# Altium PCB kretskort.PcbDoc
Units mm, origin at the board's own origin, x right, y up, seen from the top; angles counter-clockwise.
Board outline 58.95 x 35.81 mm, 4 copper layers (L1 - SIG, L2 - PWR, L3 - GND, L4 - SIG), stack 0.603 mm thick; 21 components, 41 nets, 122 pads, 56 vias.
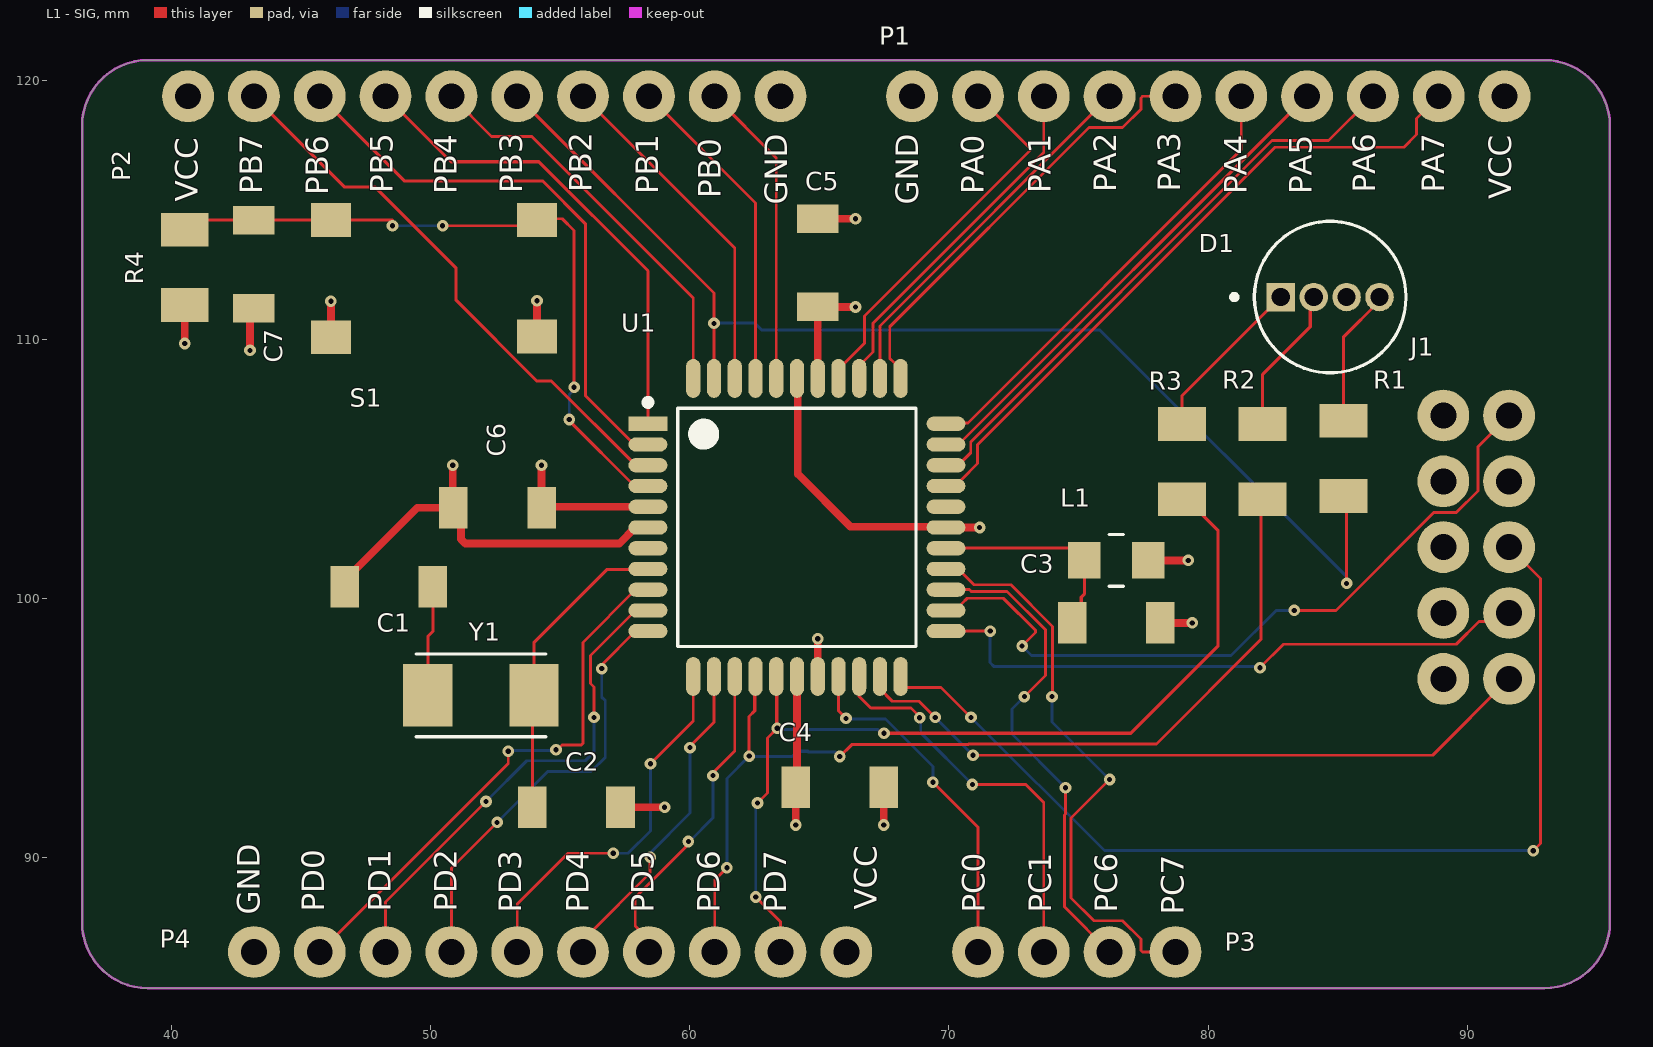
[diagram p0: L1 - SIG view]
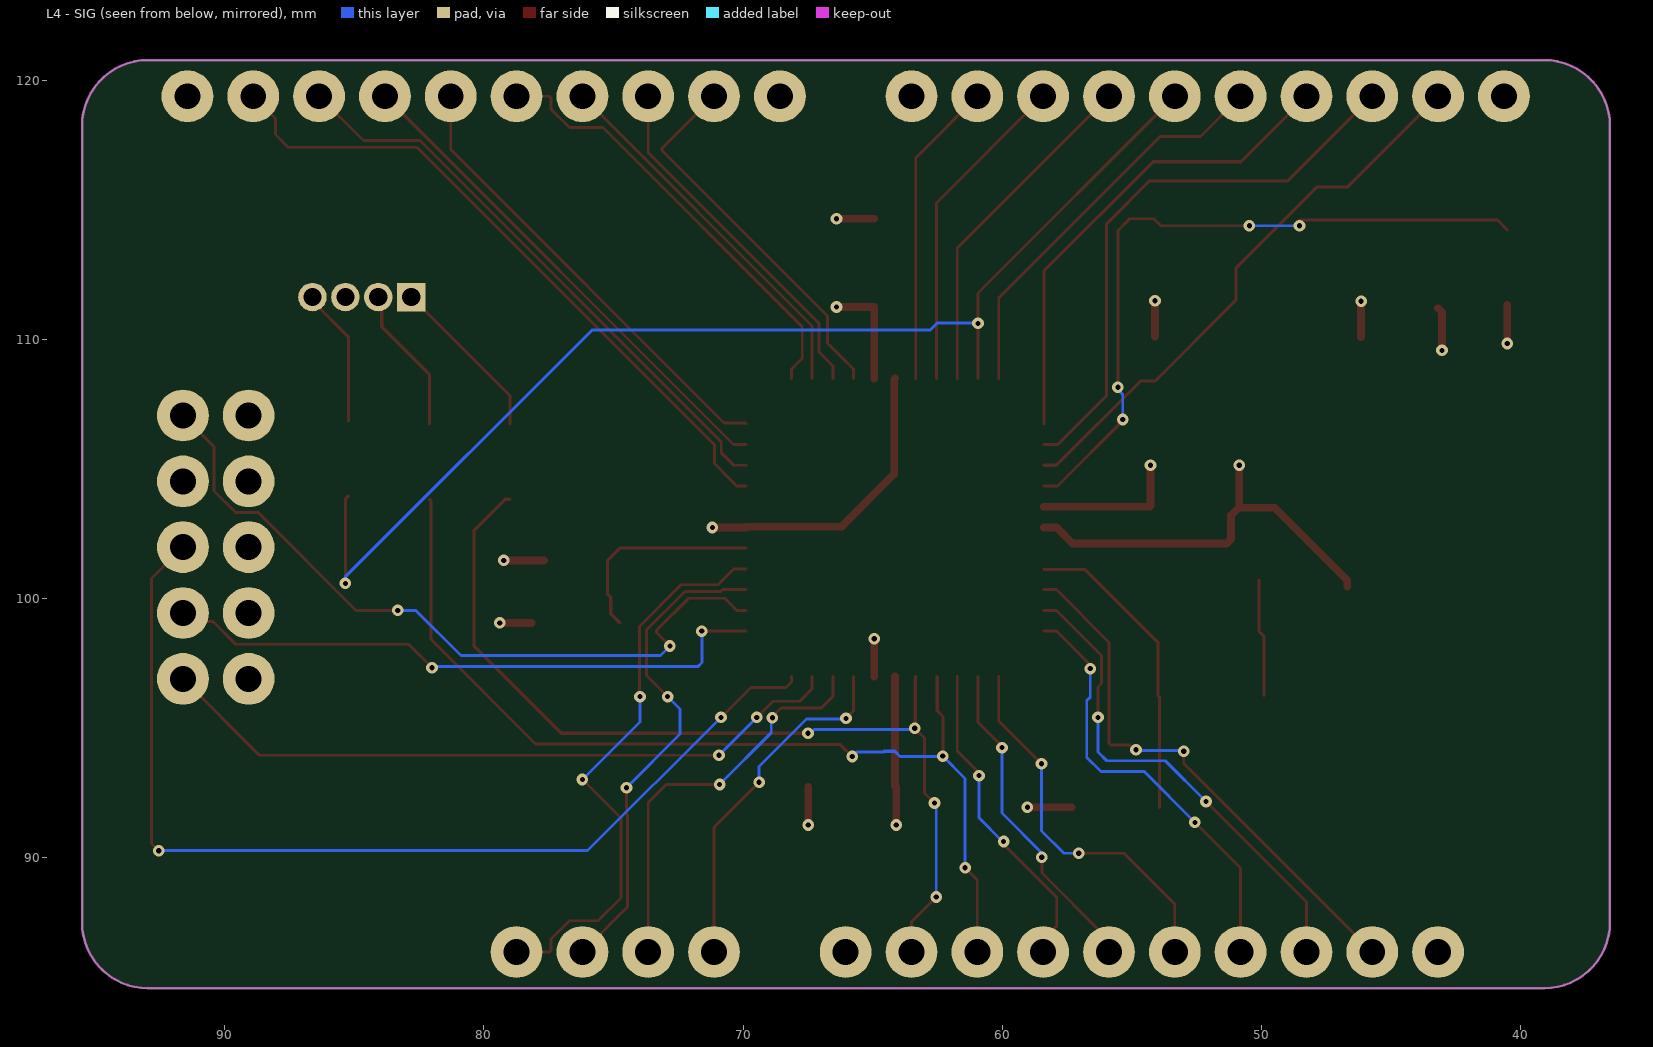
[diagram p1: L4 - SIG view, seen from below]
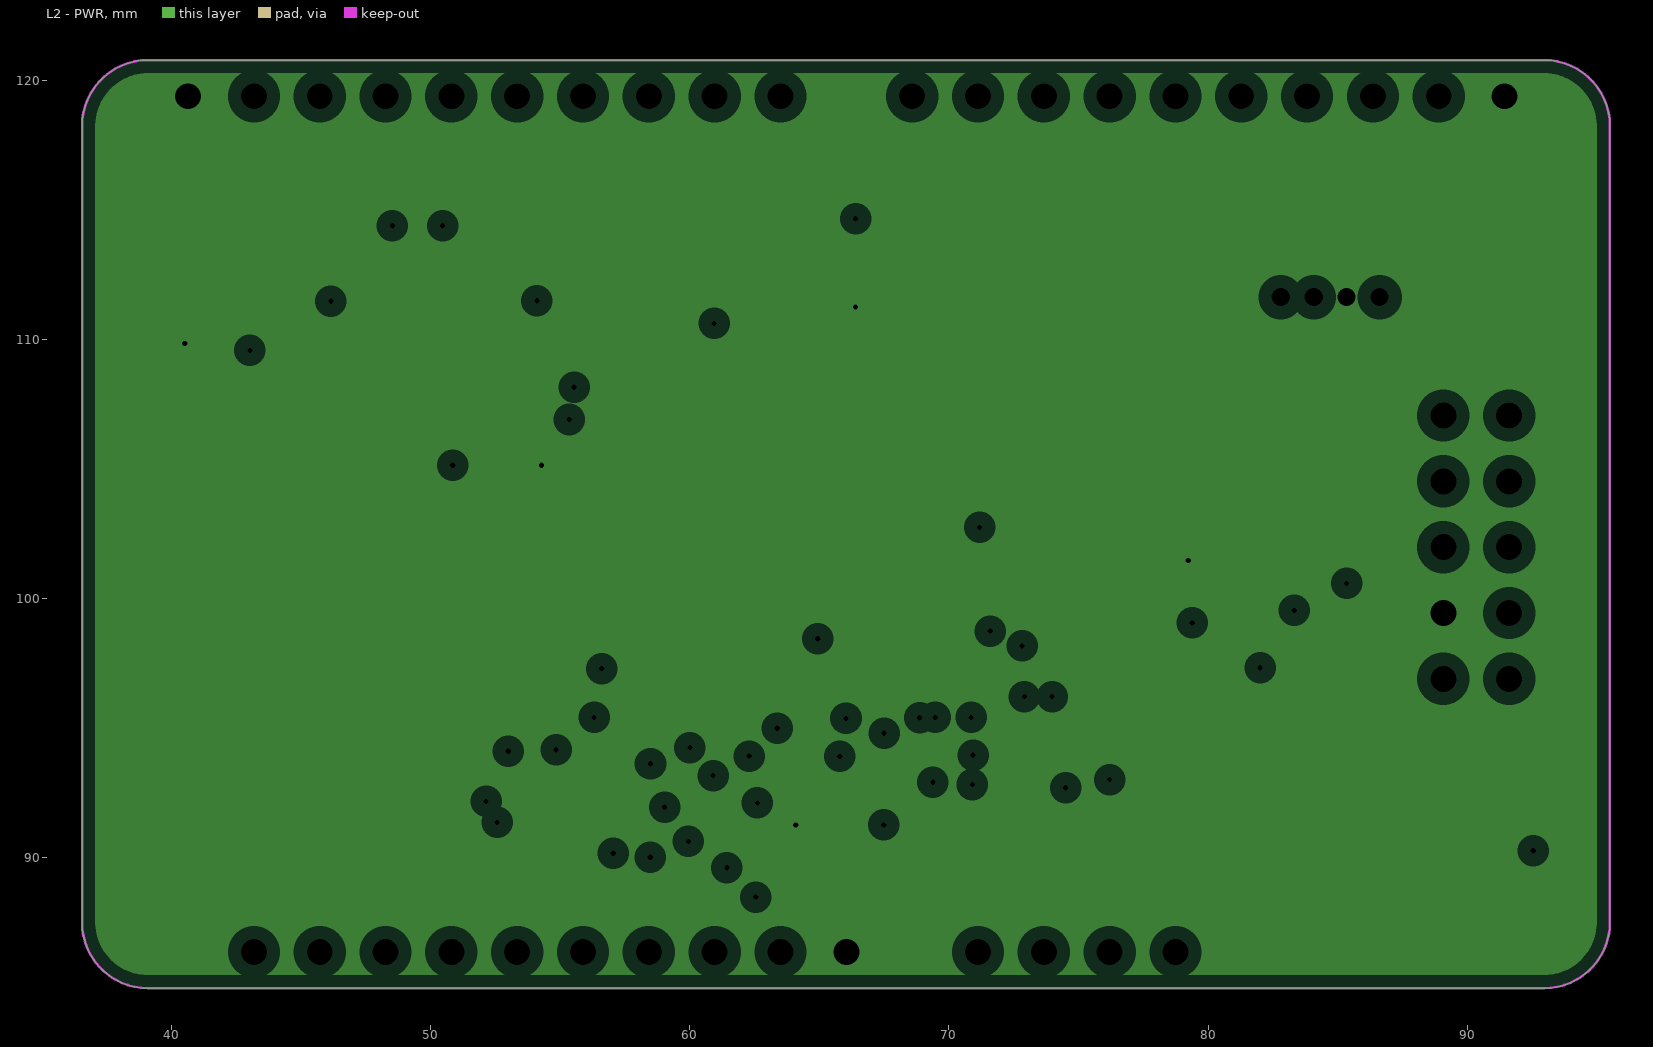
[diagram p2: L2 - PWR, clearances drawn from the general rule]
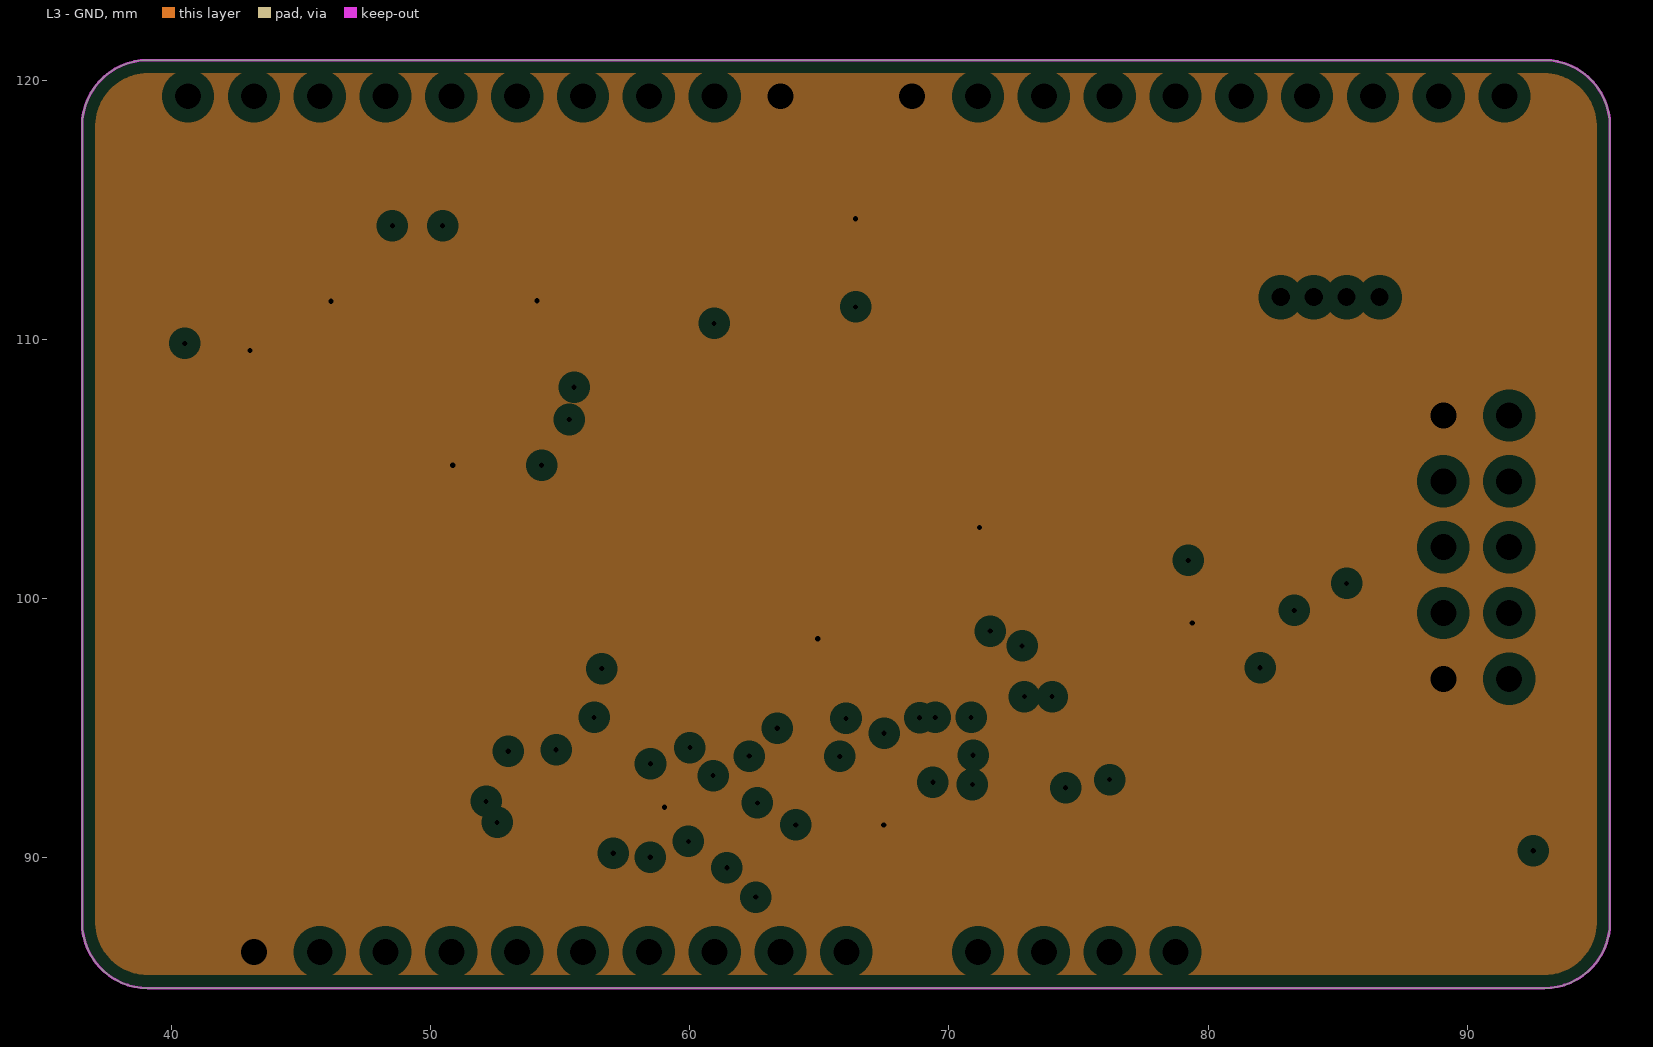
[diagram p3: L3 - GND, clearances drawn from the general rule]

## Layer stack, top to bottom
Top Solder: solder mask 0.0102, Solder Resist, Dk 3.5
L1 - SIG: signal copper 0.0356
Dielectric 2: prepreg 0.0711, PP-006, Dk 4.1
L2 - PWR: plane copper 0.035, net VCC
Dielectric 1: dielectric 0.32, FR-4, Dk 4.8
L3 - GND: plane copper 0.035, net GND
Dielectric 3: prepreg 0.0711, PP-006, Dk 4.1
L4 - SIG: signal copper 0.0356
Bottom Solder: solder mask 0.0102, Solder Resist, Dk 3.5

## Board outline
39.091,84.963 cw(c39.091,87.503) 36.551,87.503 36.551,118.237 cw(c39.091,118.237) 39.091,120.777 92.964,120.777 cw(c92.964,118.237) 95.504,118.237 95.504,87.503 cw(c92.964,87.503) 92.964,84.963

## Design rules (kind name [scope] priority, off if disabled: settings)
Clearance [All] p1: gap=0.15 ignorepadtopadclearanceinfootprint=FALSE except(0: Arc-Hole Track-Hole SMDPad-Hole THPad-Hole Via-Hole Fill-Hole Poly-Hole Region-Hole Text-Hole)
MinimumSolderMaskSliver [All] p1: minsoldermaskwidth=0.1
PlaneClearance [All] p1: clearance=0.508
PlaneConnect [All] p1: planeconnectstyle=Direct reliefexpansion=0.508 reliefentries=4 reliefconductorwidth=0.254 reliefairgap=0.254
PolygonConnect [All] p1: connectstyle=Relief reliefconductorwidth=0.254 reliefentries=4 polygonreliefangle="90 Angle" airgapwidth=0.254
RoutingVias [All] p1: holewidth=0.2 width=0.45 viastyle="Through Hole" minholewidth=0.2 minwidth=0.45 maxholewidth=0.4 maxwidth=0.8
SilkToSilkClearance [All] p1: silktosilkclearance=0.1
SilkToSolderMaskClearance [IsPad] p1: minsilkscreentomaskgap=0.1 clearancetoexposedcopper=TRUE
SolderMaskExpansion [All] p1: expansion=0.102 istentingtop=FALSE
Width Width_1 [InNet('VCC') or InNet('GND')] p1: maxlimit=0.3 minlimit=0.3 preferedwidth=0.3
Width [All] p2: maxlimit=0.8 minlimit=0.11 preferedwidth=0.12
25 further rules are at their usual default settings.

## Components (designator, comment, footprint, x,y, rotation, side; value= is the part's Value field where it differs from the comment)
C1 "CAP, 1206" 1206_180 48.387,100.457 r0 top value=10p
C2 "CAP, 1206" 1206_180 55.626,91.948 r0 top value=10p
C3 "CAP, 1206" 1206_180 76.454,99.06 r0 top value=100n
C4 "CAP, 1206" 1206_180 65.786,92.723 r0 top value=100n
C5 "CAP, 1206" 1206_180 64.935,112.952 r90 top value=100n
C6 "CAP, 1206" 1206_180 52.578,103.505 r180 top value=100n
C7 "CAP, 1206" 1206_180 43.18,112.903 r270 top value=100n
D1 "RGB LED" LED_QBL8RGB60D0-2897 84.709,111.633 r0 top
J1 "JTAG Connector" Atmel_JTAG 91.605,96.876 r90 top
L1 "Inductor, NLFV25T" INDM2520X190N 76.454,101.473 r180 top value=10u
P1 "1x10 Pin Header" 1x10_PIN_HEADER_2.54MM 91.44,119.38 r270 top locked value="1x2 Pin Header"
P2 "1x10 Pin Header" 1x10_PIN_HEADER_2.54MM 40.64,119.38 r90 top locked value="1x2 Pin Header"
P3 "1x4 Pin Header" 1x4_PIN_HEADER_2.54MM 78.74,86.36 r270 top locked value="1x2 Pin Header"
P4 "1x10 Pin Header" 1x10_PIN_HEADER_2.54MM 66.04,86.36 r270 top locked value="1x2 Pin Header"
R1 "RES, 1206" 1206 85.217,105.41 r90 top value=0
R2 "RES, 1206" 1206 82.105,105.283 r90 top value=0
R3 "RES, 1206" 1206 78.994,105.283 r90 top value=0
R4 "RES, 1206" 1206 40.513,112.776 r270 top value=0
S1 "Tactile Button" "tacButton smd" 54.102,110.109 r180 top value="Button SMD"
U1 "ATmega1284" TQFP-44 64.135,102.743 r0 top value=ATmega644PA
Y1 "XTAL-ABM3" XTAL_ABM3 51.943,96.266 r180 top

## Footprints (in the part's own frame and the unit in brackets; to place one, negate y for a bottom-side part, rotate by r counter-clockwise, add the part's x,y. Pads: shape width x height; smd on the part's side, far side on the other; paste and mask are expansions set on the pad)
1x4_PIN_HEADER_2.54MM [mm]
  round 2 hole 1: 1(0,0) 2(0,-2.54) 3(0,-5.08) 4(0,-7.62)
  body extent -1.24,-8.89 1.24,1.27, height 8.54
1x10_PIN_HEADER_2.54MM [mm]
  round 2 hole 1: 1(0,0) 2(0,-2.54) 3(0,-5.08) 4(0,-7.62) 5(0,-10.16) 6(0,-12.7) 7(0,-15.24) 8(0,-17.78) 9(0,-20.32) 10(0,-22.86)
  body extent -1.24,-24.13 1.24,1.27, height 8.54
1206 [mm]
  rect 1.3x1.85 smd: 1(-1.45,0) 2(1.45,0)
  body extent -1.7,-0.9 1.7,0.9, height 1.35
1206_180 [mm]
  rect 1.1x1.6 smd: 1(-1.7,0) 2(1.7,0)
  body extent -1.75,-0.95 1.75,0.95, height 1.8
Atmel_JTAG [mm]
  round 2 hole 1: 1(0.028,-0.01) 2(0.028,2.53) 3(2.568,-0.01) 4(2.568,2.53) 5(5.108,-0.01) 6(5.108,2.53) 7(7.648,-0.01) 8(7.648,2.53) 9(10.188,-0.01) 10(10.188,2.53)
  body extent -1.15,-1.36 11.55,3.64, height 8.6
INDM2520X190N [mm]
  rect 1.26x1.41 smd: 1(-1.23,0) 2(1.23,0)
  silkscreen extent -0.28,-1 0.28,1, body extent -1.25,-1 1.25,1, height 1.9
LED_QBL8RGB60D0-2897 [mm]
  rect 1.1x1.1 / inner round 1.1 / far side rect 1.1x1.1 hole 0.7: 1(-1.905,0)
  round 1.1 hole 0.7: 2(-0.635,0) 3(0.635,0) 4(1.905,0)
  silkscreen extent -3.8,-2.92 2.93,2.92, body extent -2.91,-2.93 2.4,2.93, height 8.65
"tacButton smd" [mm]
  rect 1.55x1.3 smd: 1(0,0) 2(0,-4.5) 3(7.95,0.023) 4(7.95,-4.5)
  body extent -0.55,-5.25 8.45,0.75, height 4.3
TQFP-44 [mm] "QFP, 44-Leads, Body 10,00x10,00mm, Pitch 0,80mm, IPC Medium Density"
  rect 1.5x0.55 smd mask+0.01: 1(-5.75,4)
  oval 1.5x0.55 smd mask+0.01: 2(-5.75,3.2) 3(-5.75,2.4) 4(-5.75,1.6) 5(-5.75,0.8) 6(-5.75,0) 7(-5.75,-0.8) 8(-5.75,-1.6) 9(-5.75,-2.4) 10(-5.75,-3.2) 11(-5.75,-4) 23(5.75,-4) 24(5.75,-3.2) 25(5.75,-2.4) 26(5.75,-1.6) 27(5.75,-0.8) 28(5.75,0) 29(5.75,0.8) 30(5.75,1.6) 31(5.75,2.4) 32(5.75,3.2) 33(5.75,4)
  oval 0.55x1.5 smd mask+0.01: 12(-4,-5.75) 13(-3.2,-5.75) 14(-2.4,-5.75) 15(-1.6,-5.75) 16(-0.8,-5.75) 17(0,-5.75) 18(0.8,-5.75) 19(1.6,-5.75) 20(2.4,-5.75) 21(3.2,-5.75) 22(4,-5.75) 34(4,5.75) 35(3.2,5.75) 36(2.4,5.75) 37(1.6,5.75) 38(0.8,5.75) 39(0,5.75) 40(-0.8,5.75) 41(-1.6,5.75) 42(-2.4,5.75) 43(-3.2,5.75) 44(-4,5.75)
  silkscreen extent -5.87,-4.6 4.6,4.95, body extent -6,-6 6,6, height 1.1
XTAL_ABM3 [mm]
  rect 1.9x2.4 smd: 1(-2.05,0) 2(2.05,0)
  silkscreen extent -2.5,-1.6 2.5,1.6, body extent -2.5,-1.6 2.5,1.6, height 1.3

## Part data
C1 C2 C3 C4 C5 C6 C7: PartNumber=CGA5L1X7R0J226M160AC, ComponentLink1Description="Datasheet link", ComponentLink1URL=https://product.tdk.com/en/search/capacitor/ceramic/mlcc/info?part_no=CGA5L1X7R0J226M160AC, TaMax_C=125°C, TaMin_C=-55°C, VDC=0V
D1: "Lovisas LED"
J1: library part "Atmel JTAG", "Atmel JTAG Connector"
L1: "Shielded Inductor"
P1 P2 P3 P4: "2.54 mm, TH"
R1 R2 R3 R4: PartNumber=PMR18EZPFV2L00, Power_W=1W, ComponentLink1Description="Datasheet link", ComponentLink1URL=http://www.rohm.com/web/global/datasheet/PMR18EZPFV/pmr-e
S1: "Tactile Switch Small Low"
U1: "ATmega1284 - TQFP44", Farnell=2484915

## Via types
v1: diameter 0.45, hole 0.2, L1 - SIG to L4 - SIG, 56 vias

## Nets (pads, with @x,y where several pads share a name; then routed paths per layer and width w, separated by ;. In a path a pad name is that pad's centre, name@x,y a point inside that pad or via, vN(x,y) a via of type N, cw(c..) or ccw(c..) an arc to the next point about the centre after c; other vN are vias at no path point)
GND: C1.1 C2.2 C3.2 C4.2 C5.2 C6.2 C7.2 J1.2 J1.10 P1.10 P2.10 P4.10 S1.1 S1.3 U1.6 U1.18 U1.28 U1.39 | length 39.7
  L1 - SIG w0.3: v1(43.028,109.576) 43.028,111.051 C7.2 ; S1.3 v1(46.152,111.471) ; C1.1 46.687,100.707 49.485,103.505 C6.2 ; v1(50.851,105.143) 50.851,103.532 C6.2 ; S1.1 v1(54.102,111.493) ; C2.2 v1(59.03,91.948) ; U1.6 57.897,102.743 57.275,102.121 51.344,102.121 51.168,102.296 51.168,103.215 C6.2 ; U1.39 64.164,108.464 64.164,104.81 66.202,102.772 69.856,102.772 U1.28 v1(71.183,102.743) ; U1.18 v1(64.935,98.45) ; C5.2 v1(66.396,114.652) ; v1(67.486,91.262) C4.2 C4.2@67.486,92.473 ; C3.2 v1(79.388,99.06)
NetC1_2: C1.2 Y1.2 | length 4.5
  L1 - SIG w0.12: Y1.2 49.893,98.534 50.087,98.728 C1.2@50.087,100.707
NetC2_1: C2.1 U1.8 Y1.1 | length 12
  L1 - SIG w0.12: C2.1 53.926,96.199 Y1.1 53.993,98.316 56.791,101.114 58.356,101.114 U1.8
NetC3_1: C3.1 L1.2 U1.27 | length 8.1
  L1 - SIG w0.12: U1.27 74.754,101.943 L1.2 75.224,100.168 75.104,100.048 75.104,99.41 C3.1
NetD1_1: D1.1 R3.2 | length 6.5
  L1 - SIG w0.12: R3.2 78.994,107.823 D1.1
NetD1_2: D1.2 R2.2 | length 5.7
  L1 - SIG w0.12: R2.2 82.105,108.648 83.94,110.483 83.94,111.499 D1.2
NetD1_4: D1.4 R1.2 | length 5.4
  L1 - SIG w0.12: R1.2 85.217,110.086 86.614,111.483 D1.4
PA0: P1.9 U1.37 | length 14.8
  L1 - SIG w0.11: U1.37 65.735,108.849 65.995,109.109 65.997,109.109 66.739,109.85 66.739,110.896 73.125,117.283 73.125,117.375 P1.9
PA1: P1.8 U1.36 | length 13.8
  L1 - SIG w0.11: U1.36 66.535,108.968 67.075,109.508 67.075,110.623 73.66,117.208 P1.8
PA2: P1.7 U1.35 | length 14.6
  L1 - SIG w0.11: U1.35 67.335,110.515 P1.7
PA3: P1.6 U1.34 | length 17.1
  L1 - SIG w0.11: U1.34 68.135,108.849 67.875,109.109 67.873,109.109 67.716,109.265 67.716,110.49 75.401,118.175 76.699,118.175 77.405,118.881 77.405,119.316 77.469,119.38 P1.6
PA4: P1.5 U1.33 | length 17.8
  L1 - SIG w0.11: U1.33 69.916,106.774 70.731,106.774 81.28,117.323 P1.5
PA5: P1.4 U1.32 | length 19.5
  L1 - SIG w0.11: U1.32 70.371,105.943 83.808,119.38 P1.4
PA6: P1.3 U1.31 | length 22.6
  L1 - SIG w0.11: U1.31 70.36,105.143 70.84,105.623 70.84,106.044 82.468,117.671 84.651,117.671 P1.3
PA7: P1.2 U1.30 | length 26
  L1 - SIG w0.11: U1.30 70.241,104.343 70.501,104.603 70.501,104.605 71.1,105.204 71.1,105.936 82.575,117.411 87.554,117.411 88.046,117.904 88.046,118.526 P1.2
PB0: P2.9 U1.40 | length 11.9
  L1 - SIG w0.11: P2.9 63.335,117.005 U1.40
PB1: P2.8 U1.41 | length 12.6
  L1 - SIG w0.11: P2.8 62.535,115.265 U1.41
PB2: P2.7 U1.42 | length 13.3
  L1 - SIG w0.11: P2.7 61.735,113.525 U1.42
PB3/OC0A: P2.6 R1.1 U1.43 | length 46.2
  L1 - SIG w0.11: P2.6 60.935,111.785 v1(60.935,110.617)
  L1 - SIG w0.12: U1.43 v1(60.935,110.617) ; R1.1 85.344,103.833 v1(85.344,100.584)
  L4 - SIG w0.12: v1(60.935,110.617) 60.947,110.63 62.505,110.63 62.772,110.363 75.819,110.363 85.344,100.838 v1(85.344,100.584)
PB4: P2.5 U1.44 | length 15.7
  L1 - SIG w0.11: P2.5 52.349,117.831 53.899,117.831 60.135,111.594 U1.44
PB5: P2.4 U1.1 | length 18.8
  L1 - SIG w0.12: P2.4 50.786,116.854 54.177,116.854 58.385,112.646 U1.1
PB6: P2.3 U1.2 | length 22.1
  L1 - SIG w0.12: P2.3 48.984,116.116 54.317,116.116 55.972,114.461 55.972,107.834 57.863,105.943 U1.2
PB7: P2.2 U1.3 | length 21.8
  L1 - SIG w0.12: P2.2 46.687,115.873 47.862,115.873 50.985,112.75 50.985,111.504 54.095,108.394 54.659,108.394 57.91,105.143 U1.3
PC0: P3.4 U1.19 | length 13.7
  L1 - SIG w0.11: U1.19 65.735,95.669 v1(66.027,95.377) ; v1(69.38,92.913) 71.12,91.173 P3.4
  L4 - SIG w0.11: v1(66.027,95.377) 66.078,95.377 66.103,95.352 67.551,95.352 69.38,93.523 v1(69.38,92.913)
PC1: P3.3 U1.20 | length 15.7
  L1 - SIG w0.11: U1.20 66.535,96.228 66.985,95.778 68.535,95.778 68.869,95.443 v1(68.869,95.401) ; v1(70.904,92.824) 72.962,92.824 73.66,92.126 P3.3
  L4 - SIG w0.11: v1(68.869,95.401) 68.91,95.36 68.91,94.818 v1(70.904,92.824)
PC6: P3.2 U1.25 | length 19
  L1 - SIG w0.11: U1.25 70.79,100.343 70.86,100.273 72.244,100.273 73.724,98.793 73.724,97.028 v1(72.911,96.215) ; v1(74.498,92.697) 74.498,91.681 74.454,91.637 74.454,88.106 P3.2
  L4 - SIG w0.11: v1(72.911,96.215) 72.428,95.733 72.428,94.767 v1(74.498,92.697)
PC7: P3.1 U1.26 | length 22.2
  L1 - SIG w0.11: U1.26 70.358,101.143 70.968,100.533 72.39,100.533 73.999,98.924 73.999,96.237 v1(73.977,96.215) ; v1(76.2,93.015) 74.714,91.529 74.714,88.443 75.592,87.565 76.699,87.565 77.405,86.859 77.405,86.424 77.469,86.36 P3.1
  L4 - SIG w0.11: v1(73.977,96.215) 73.977,95.237 v1(76.2,93.015)
PD0: P4.9 U1.9 | length 21
  L1 - SIG w0.11: P4.9 52.997,93.637 v1(52.997,94.107) ; v1(54.839,94.169) 54.889,94.169 55.073,94.353 55.811,94.353 55.875,94.417 55.875,98.308 57.91,100.343 U1.9
  L4 - SIG w0.11: v1(52.997,94.107) 53.028,94.138 54.808,94.138 v1(54.839,94.169)
PD1: P4.8 U1.10 | length 19.1
  L1 - SIG w0.11: P4.8 48.26,88.292 v1(52.139,92.171) ; v1(56.305,95.415) 56.305,96.591 56.174,96.723 56.174,97.807 57.91,99.543 U1.10
  L4 - SIG w0.11: v1(52.139,92.171) 53.707,93.739 55.969,93.739 56.305,94.075 v1(56.305,95.415)
PD2: P4.7 U1.11 | length 16.9
  L1 - SIG w0.11: P4.7 50.8,89.599 v1(52.565,91.364) ; v1(56.604,97.295) 56.604,97.437 57.91,98.743 U1.11
  L4 - SIG w0.11: v1(52.565,91.364) 54.521,93.32 56.185,93.32 56.735,93.87 56.735,96.06 56.604,96.191 v1(56.604,97.295)
PD3: P4.6 U1.12 | length 14.8
  L1 - SIG w0.11: P4.6 53.34,88.214 55.296,90.17 v1(57.048,90.17) ; v1(58.483,93.624) 60.135,95.276 U1.12
  L4 - SIG w0.11: v1(57.048,90.17) 57.62,90.17 58.483,91.034 v1(58.483,93.624)
PD4: P4.5 U1.13 | length 12.8
  L1 - SIG w0.11: P4.5 56.07,86.55 56.07,87.007 58.471,89.408 v1(58.471,90.018) ; v1(60.008,94.247) 60.008,94.297 60.935,95.225 U1.13
  L4 - SIG w0.11: v1(58.471,90.018) 58.434,90.055 58.434,90.146 60.008,91.719 v1(60.008,94.247)
PD5: P4.4 U1.14 | length 12.5
  L1 - SIG w0.11: P4.4 58.42,86.842 57.892,87.369 57.892,88.462 59.835,90.405 59.835,90.426 59.944,90.535 v1(59.944,90.627) ; v1(60.896,93.167) 60.885,93.179 60.885,93.27 61.735,94.12 U1.14
  L4 - SIG w0.11: v1(59.944,90.627) 59.982,90.627 60.896,91.542 v1(60.896,93.167)
PD6/OC2B: P4.3 R2.1 U1.15 | length 38.6
  L1 - SIG w0.11: P4.3 60.96,89.141 v1(61.43,89.611) v1@61.481,89.56
  L1 - SIG w0.12: v1(62.295,93.918) 62.284,93.93 62.284,95.447 62.506,95.669 62.506,96.964 U1.15 ; v1(65.786,93.907) 66.244,94.365 70.725,94.365 70.749,94.39 78.007,94.39 82.042,98.425 82.042,103.77 R2.1
  L4 - SIG w0.11: v1(61.43,89.611) 61.43,93.053 v1(62.295,93.918)
  L4 - SIG w0.12: v1(62.295,93.918) 62.307,93.907 63.941,93.907 64.141,94.107 64.551,94.107 64.584,94.073 65.62,94.073 v1(65.786,93.907)
PD7/OC2A: P4.2 R3.1 U1.16 | length 36.2
  L1 - SIG w0.11: v1(62.547,88.481) 63.5,87.528 P4.2 ; v1(62.611,92.113) 62.992,92.494 62.992,94.615 v1(63.373,94.996)
  L1 - SIG w0.12: U1.16 63.354,96.974 63.354,95.015 v1(63.373,94.996) ; v1(67.495,94.8) 77.02,94.8 80.378,98.158 80.378,102.634 79.179,103.833 R3.1
  L4 - SIG w0.11: v1(62.547,88.481) 62.547,92.05 v1(62.611,92.113)
  L4 - SIG w0.12: v1(63.373,94.996) 63.427,94.942 67.263,94.942 67.406,94.8 v1(67.495,94.8)
R\S\T\: C7.1 R4.1 S1.2 S1.4 U1.4 | length 27.2
  L1 - SIG w0.11: R4.1 40.89,114.603 C7.1 46.146,114.603 S1.4 48.531,114.609 48.531,114.389 v1(48.527,114.385) ; v1(50.461,114.385) 53.878,114.385 S1.2 54.149,114.656 55.08,114.656 55.537,114.198 v1(55.537,108.153) ; v1(55.347,106.909) 55.347,106.858 57.861,104.343 U1.4
  L4 - SIG w0.11: v1(48.527,114.385) v1(50.461,114.385) ; v1(55.347,106.909) 55.347,107.871 55.537,108.061 v1(55.537,108.153)
TCK: J1.1 U1.21 | length 27
  L1 - SIG w0.11: U1.21 67.335,96.518 67.815,96.038 68.846,96.038 v1(69.469,95.415) ; v1(70.929,93.955) 88.667,93.955 J1.1
  L4 - SIG w0.11: v1(69.469,95.415) v1(70.929,93.955)
TDI: J1.9 U1.24 | length 28.8
  L1 - SIG w0.11: U1.24 70.241,99.543 70.501,99.803 70.501,99.805 70.708,100.013 72.098,100.013 73.335,98.775 73.335,98.684 v1(72.822,98.171) ; v1(83.325,99.543) 84.93,99.543 88.706,103.318 89.574,103.318 90.41,104.154 90.41,105.858 J1.9
  L4 - SIG w0.11: v1(72.822,98.171) 73.19,97.803 80.886,97.803 82.626,99.543 v1(83.325,99.543)
TDO: J1.3 U1.23 | length 23.9
  L1 - SIG w0.11: U1.23 v1(71.59,98.742) ; v1(82.004,97.333) 82.909,98.238 89.574,98.238 90.45,99.114 91.286,99.114 J1.3
  L4 - SIG w0.11: v1(71.59,98.742) 71.59,97.529 71.748,97.371 81.966,97.371 v1(82.004,97.333)
TMS: J1.5 U1.22 | length 39.6
  L1 - SIG w0.11: U1.22 68.135,96.776 68.338,96.573 69.695,96.573 v1(70.853,95.415) ; J1.5 92.82,100.778 92.82,90.548 v1(92.545,90.272)
  L4 - SIG w0.11: v1(70.853,95.415) 75.997,90.272 v1(92.545,90.272)
VCC: C4.1 C5.1 C6.1 D1.3 J1.4 L1.1 P1.1 P2.1 P4.1 R4.2 U1.5 U1.17 U1.38 | length 18.7
  L1 - SIG w0.3: v1(40.513,109.842) R4.2 ; v1(54.28,105.143) 54.28,103.579 54.316,103.543 U1.5 ; v1(64.086,91.262) C4.1 64.135,92.772 U1.17 ; U1.38 C5.1 v1(66.396,111.252) ; L1.1 v1(79.235,101.473)
pads on no net: J1.6 J1.7 J1.8 U1.7 U1.29

## Polygon pours and split planes (outlines as drawn)
VCC on L2 - PWR (split plane): 93.163,120.259 93.36,120.23 93.554,120.181 93.742,120.114 93.922,120.029 94.093,119.926 94.253,119.808 94.401,119.674 94.535,119.526 94.653,119.366 94.756,119.195 94.841,119.015 94.908,118.827 94.957,118.633 94.986,118.436 94.995,118.253 94.994,118.237 94.994,87.503 94.995,87.487 94.986,87.304 94.957,87.107 94.908,86.913 94.841,86.725 94.756,86.545 94.653,86.374 94.535,86.214 94.401,86.066 94.253,85.932 94.093,85.814 93.922,85.711 93.742,85.626 93.554,85.559 93.36,85.51 93.163,85.481 92.98,85.472 92.964,85.473 39.091,85.473 39.075,85.472 38.891,85.481 38.694,85.51 38.501,85.559 38.313,85.626 38.133,85.711 37.962,85.814 37.802,85.932 37.654,86.066 37.52,86.214 37.401,86.374 37.299,86.545 37.213,86.725 37.146,86.913 37.098,87.107 37.068,87.304 37.059,87.487 37.061,87.503 37.061,118.237 37.059,118.253 37.068,118.436 37.098,118.633 37.146,118.827 37.213,119.015 37.299,119.195 37.401,119.366 37.52,119.526 37.654,119.674 37.802,119.808 37.962,119.926 38.133,120.029 38.313,120.114 38.501,120.181 38.694,120.23 38.891,120.259 39.075,120.268 39.091,120.267 92.964,120.267 92.98,120.268
GND on L3 - GND (split plane): 93.163,120.259 93.36,120.23 93.554,120.181 93.742,120.114 93.922,120.029 94.093,119.926 94.253,119.808 94.401,119.674 94.535,119.526 94.653,119.366 94.756,119.195 94.841,119.015 94.908,118.827 94.957,118.633 94.986,118.436 94.995,118.253 94.994,118.237 94.994,87.503 94.995,87.487 94.986,87.304 94.957,87.107 94.908,86.913 94.841,86.725 94.756,86.545 94.653,86.374 94.535,86.214 94.401,86.066 94.253,85.932 94.093,85.814 93.922,85.711 93.742,85.626 93.554,85.559 93.36,85.51 93.163,85.481 92.98,85.472 92.964,85.473 39.091,85.473 39.075,85.472 38.891,85.481 38.694,85.51 38.501,85.559 38.313,85.626 38.133,85.711 37.962,85.814 37.802,85.932 37.654,86.066 37.52,86.214 37.401,86.374 37.299,86.545 37.213,86.725 37.146,86.913 37.098,87.107 37.068,87.304 37.059,87.487 37.061,87.503 37.061,118.237 37.059,118.253 37.068,118.436 37.098,118.633 37.146,118.827 37.213,119.015 37.299,119.195 37.401,119.366 37.52,119.526 37.654,119.674 37.802,119.808 37.962,119.926 38.133,120.029 38.313,120.114 38.501,120.181 38.694,120.23 38.891,120.259 39.075,120.268 39.091,120.267 92.964,120.267 92.98,120.268

## Keep-outs
Keep-Out Layer:
  the board outline again, w0.1

## Silkscreen, mask and mechanical layers (free items; w line width, h text height)
Top Overlay:
  text "PA3" at 79.219,115.695 h1.5 r90
  text "PB2" at 56.504,115.67 h1.5 r90
  text "PA2" at 76.748,115.67 h1.5 r90
  text "PA6" at 86.746,115.659 h1.5 r90
  text "PA7" at 89.405,115.659 h1.5 r90
  text "PB5" at 48.828,115.632 h1.5 r90
  text "PB3" at 53.819,115.632 h1.5 r90
  text "PA1" at 74.22,115.632 h1.5 r90
  text "PB7" at 43.791,115.594 h1.5 r90
  text "PB4" at 51.297,115.594 h1.5 r90
  text "PB1" at 59.069,115.594 h1.5 r90
  text "PA0" at 71.637,115.594 h1.5 r90
  text "PA4" at 81.777,115.594 h1.5 r90
  text "PA5" at 84.286,115.594 h1.5 r90
  text "PB6" at 46.339,115.556 h1.5 r90
  text "PB0" at 61.477,115.454 h1.5 r90
  text "VCC" at 91.982,115.415 h1.5 r90
  text "VCC" at 41.298,115.314 h1.5 r90
  text "GND" at 64.042,115.2 h1.5 r90
  text "GND" at 69.097,115.2 h1.5 r90
  text "VCC" at 67.498,87.997 h1.5 r90
  text "PD0" at 46.194,87.92 h1.5 r90
  text "PD1" at 48.752,87.92 h1.5 r90
  text "PD2" at 51.292,87.92 h1.5 r90
  text "PD3" at 53.788,87.882 h1.5 r90
  text "PD4" at 56.384,87.882 h1.5 r90
  text "PD5" at 58.906,87.882 h1.5 r90
  text "PD6" at 61.446,87.882 h1.5 r90
  text "PD7" at 64.004,87.882 h1.5 r90
  text "PC0" at 71.675,87.87 h1.5 r90
  text "PC1" at 74.242,87.87 h1.5 r90
  text "PC6" at 76.78,87.87 h1.5 r90
  text "PC7" at 79.347,87.806 h1.5 r90
  text "GND" at 43.697,87.793 h1.5 r90